# EAGLE board CapstoneControllerBoard (1) (EAGLE 9.2.2)
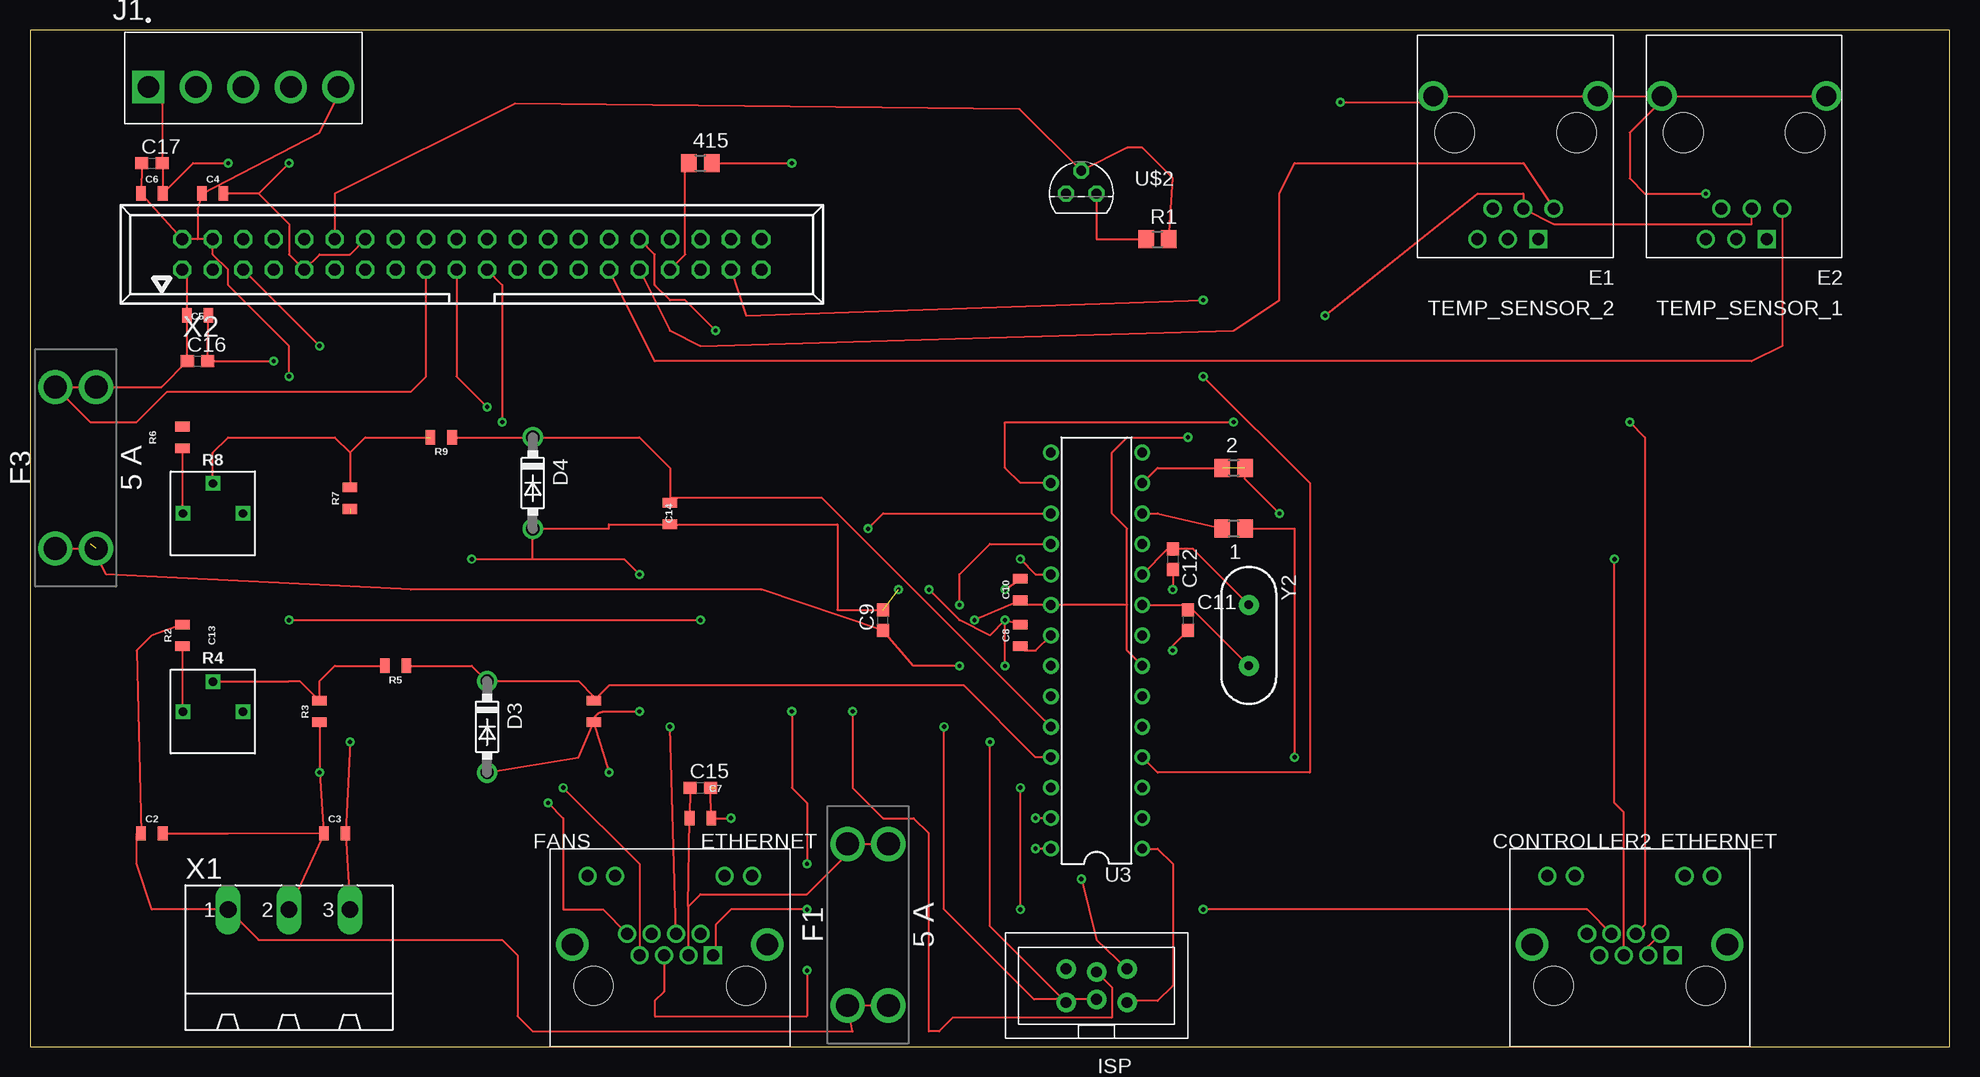
[diagram p0: board, top side]
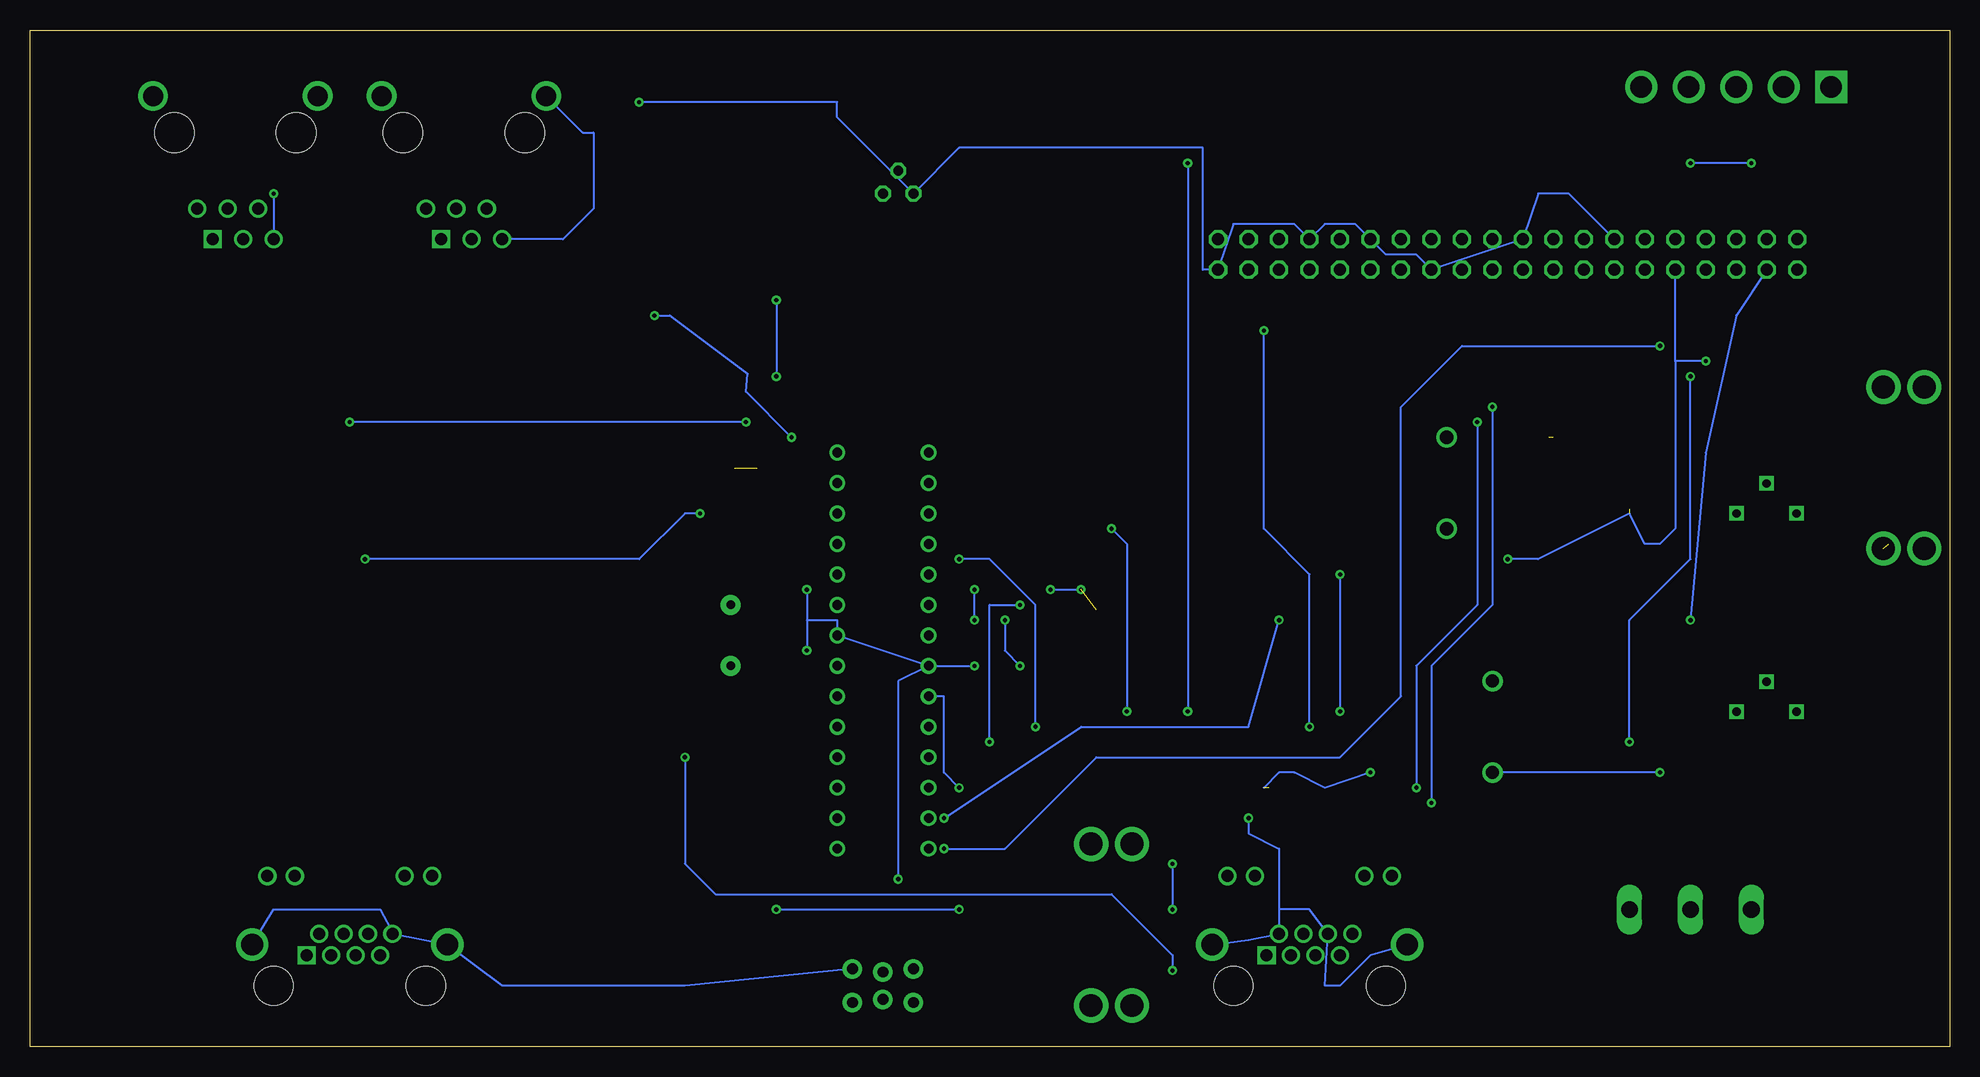
[diagram p1: board, bottom side, seen from below]

Size 160 x 84.76 mm. Coordinates in mm from the lower left corner, seen from the top.
Outline: 0,0 160,0 160,84.76 0,84.76 0,0
Copper layers (1*16): Top 0.035mm / dielectric 1.5mm / Bottom 0.035mm
Design rules "default": minimum track width 6mil, minimum drill 0.35mm, track to track 6mil, track to pad 6mil, pad to pad 6mil, via to via 6mil, smd to smd 6mil, copper to edge 40mil, drill to drill 6mil, minimum pad ring 10mil, minimum via ring 8mil, stop-mask expansion 4mil, vias tented up to drill 0mil, thermal gap 10mil

## Footprints (pad centres in the part's own frame; a part is rotated, then mirrored left to right if it is on the bottom)
R0805 = smd 1.3 x 1.5: 1 -0.95,0; 2 0.95,0
0805 = smd 0.8 x 1.2: 1 -0.9,0; 2 0.9,0
C0603 = smd 1.1 x 1: 1 -0.85,0; 2 0.85,0
A122645-ND = drill 1 square: P$1 3.58,2.54 | drill 1: P$2 2.56,4.32; P$3 1.54,2.54; P$4 0.52,4.32; P$5 -0.5,2.54; P$6 -1.52,4.32; P$7 -2.54,2.54; P$8 -3.56,4.32; P$9 -6.86,9.14; P$10 -4.57,9.14; P$11 4.57,9.14; P$12 6.86,9.14 | drill 1.8: P$13 -8.13,3.43; P$14 8.13,3.43 | hole 3.25: -6.35,0; 6.35,0
DO41-7.6 = drill 1.1 pad 1.7: A 3.81,0; C -3.81,0
1734723-1_RJ11 = drill 1 square: 1 -2.54,2.54 | drill 1: 2 0,2.54; 3 2.54,2.54; 4 -3.81,0; 5 -1.27,0; 6 1.27,0 | drill 1.65: SH1 -7.5,-9.4; SH2 6.22,-9.4 | hole 3.3: -5.72,-6.35; 4.44,-6.35
KEYSTONE_ATM_FUSEHOLDER = drill 1.905: L1 -6.731,1.702; L2 -6.731,-1.702; R1 6.731,1.702; R2 6.731,-1.702
AVRISP-BOX = drill 0.9 pad 1.626: 1 -1.397,2.54; 2 1.397,2.54; 3 -1.143,0; 4 1.143,0; 5 -1.397,-2.54; 6 1.397,-2.54
TE_3-641208-5 = drill 1.78 square: 1 -7.92,0 | drill 1.78: 2 -3.96,0; 3 0,0; 4 3.96,0; 5 7.92,0
TRIM_POT = drill 0.7 square: 1 -2.5,0; 2 0,2.5; 3 2.5,0
PDIP-T28 = drill 0.813 pad 1.2: 1 -16.51,-3.81; 2 -13.97,-3.81; 3 -11.43,-3.81; 4 -8.89,-3.81; 5 -6.35,-3.81; 6 -3.81,-3.81; 7 -1.27,-3.81; 8 1.27,-3.81; 9 3.81,-3.81; 10 6.35,-3.81; 11 8.89,-3.81; 12 11.43,-3.81; 13 13.97,-3.81; 14 16.51,-3.81; 15 16.51,3.81; 16 13.97,3.81; 17 11.43,3.81; 18 8.89,3.81; 19 6.35,3.81; 20 3.81,3.81; 21 1.27,3.81; 22 -1.27,3.81; 23 -3.81,3.81; 24 -6.35,3.81; 25 -8.89,3.81; 26 -11.43,3.81; 27 -13.97,3.81; 28 -16.51,3.81
TO92 = drill 0.813 octagon: 1 -1.27,0; 2 0,1.905; 3 1.27,0
MSTBA3 = drill 1.397 long: 1 -5.08,5.08; 2 0,5.08; 3 5.08,5.08
057-040-1 = drill 1 octagon: 1 -24.13,-1.27; 2 -24.13,1.27; 3 -21.59,-1.27; 4 -21.59,1.27; 5 -19.05,-1.27; 6 -19.05,1.27; 7 -16.51,-1.27; 8 -16.51,1.27; 9 -13.97,-1.27; 10 -13.97,1.27; 11 -11.43,-1.27; 12 -11.43,1.27; 13 -8.89,-1.27; 14 -8.89,1.27; 15 -6.35,-1.27; 16 -6.35,1.27; 17 -3.81,-1.27; 18 -3.81,1.27; 19 -1.27,-1.27; 20 -1.27,1.27; 21 1.27,-1.27; 22 1.27,1.27; 23 3.81,-1.27; 24 3.81,1.27; 25 6.35,-1.27; 26 6.35,1.27; 27 8.89,-1.27; 28 8.89,1.27; 29 11.43,-1.27; 30 11.43,1.27; 31 13.97,-1.27; 32 13.97,1.27; 33 16.51,-1.27; 34 16.51,1.27; 35 19.05,-1.27; 36 19.05,1.27; 37 21.59,-1.27; 38 21.59,1.27; 39 24.13,-1.27; 40 24.13,1.27
HC49US = drill 0.7 pad 1.651: 1 -2.54,0; 2 2.54,0

## Placement (x,y rotation side)
1  110  [R0805]  100.33,43.18 180 top
2  110  [R0805]  100.33,48.26 0 top
415  [R0805]  55.88,73.66 0 top
C2  0.1uF  [0805]  10.16,17.78 0 top
C3  0.1uF  [0805]  25.4,17.78 0 top
C4  0.1uF  [0805]  15.24,71.12 0 top
C5  0.1uF  [0805]  13.97,60.96 0 top
C6  0.1uF  [0805]  10.16,71.12 0 top
C7  0.1uF  [0805]  55.88,19.05 0 top
C8  0.1uF  [0805]  82.55,34.29 90 top
C9  10uF  [C0603]  71.12,35.56 90 top
C10  0.1uF  [0805]  82.55,38.1 90 top
C11  22pF  [C0603]  96.52,35.56 270 top
C12  22pF  [C0603]  95.25,40.64 270 top
C13  0.1uF  [0805]  46.99,27.94 270 top
C14  0.1uF  [0805]  53.34,44.45 270 top
C15  10uF  [C0603]  55.88,21.59 0 top
C16  10uF  [C0603]  13.97,57.15 0 top
C17  10uF  [C0603]  10.16,73.66 0 top
CONTROLLER2  ETHERNET  [A122645-ND]  133.35,5.08 0 top
D3  3.3V Zener  [DO41-7.6]  38.1,26.67 270 top
D4  3.3V Zener  [DO41-7.6]  41.91,46.99 270 top
E1  TEMP_SENSOR_2  [1734723-1_RJ11]  123.19,69.85 180 top
E2  TEMP_SENSOR_1  [1734723-1_RJ11]  142.24,69.85 180 top
F1  5 A  [KEYSTONE_ATM_FUSEHOLDER]  69.85,10.16 90 top
F3  5 A  [KEYSTONE_ATM_FUSEHOLDER]  3.81,48.26 90 top
FANS  ETHERNET  [A122645-ND]  53.34,5.08 0 top
FRAME2  FRAME-LETTERNO_PACKAGE  [DUMMY]  -21.59,115.57 0 top  (outside the outline)
ISP  AVRISP-BOX  [AVRISP-BOX]  88.9,5.08 90 top
J1  3-641208-5  [TE_3-641208-5]  17.78,80.01 0 top
R1  [R0805]  93.98,67.31 0 top
R2  2.4k  [0805]  12.7,34.29 90 top
R3  1.2k  [0805]  24.13,27.94 90 top
R4  0-5k  [TRIM_POT]  15.24,27.94 0 top
R5  5k  [0805]  30.48,31.75 180 top
R6  16k  [0805]  12.7,50.8 90 top
R7  1.3k  [0805]  26.67,45.72 90 top
R8  0-5k  [TRIM_POT]  15.24,44.45 0 top
R9  5k  [0805]  34.29,50.8 180 top
U3  ATmega328P PDIP  [PDIP-T28]  88.9,33.02 90 top
U$2  DS18B  [TO92]  87.63,71.12 0 top
X1  MSTBA3  [MSTBA3]  21.59,6.35 0 top
X2  057-040-1  [057-040-1]  36.83,66.04 0 top
Y2  [HC49US]  101.6,34.29 270 top

## Library data of the parts
1 2 415 R1 = rcl; SPICEPREFIX: R
C2-C8 C10 C13 C14 = SparkFun-Capacitors; PROD_ID: CAP-11625
C9 C11 C12 C15-C17 ISP = adafruit
CONTROLLER2 FANS = ETHERNET-3
D3 D4 F1 F3 R4 R8 U3 = CustomLibrary
E1 E2 = 5555140-6 RJ11
FRAME2 = SparkFun-Aesthetics; DESIGNER: Ben Vandenberg; REV: 0.0; VERSION: v01
J1 = 3-641208-5; AVAILABILITY: Unavailable; COMMENT: 3-641208-5; DESCRIPTION: MTA-156 Series, 3.96mm Pitch 5 Way 1 RowStraight PCB Header, Solder Term, 7A; EU_ROHS_COMPLIANCE: Compliant; MF: TE Connectivity; MP: 3-641208-5; PACKAGE: None; PRICE: None; TE_PURCHASE_URL: https://www.te.com/usa-en/product-3-641208-5.html?te_bu=Cor&te_type=disp&te_campaign=seda_glo_cor-seda-global-disp-prtnr-fy19-seda-model-bom-cta_sma-317_1&elqCampaignId=32493
R2 R3 R5-R7 R9 = SparkFun-Resistors; PROD_ID: RES-11622
U$2 = temperatureboardElizabeth
X1 = con-phoenix-508; MF: FARNELL; MPN: 1757255; OC_FARNELL: 3705183; OC_NEWARK: 71C4162
X2 = con-panduit; OC_FARNELL: unknown; OC_NEWARK: unknown
Y2 = SparkFun-FreqCtrl

## Nets
3.3V: C9.1 C10.1 E1.5 E2.5 F3.L1 F3.L2 U3.7 U3.20
3.3V1: CONTROLLER2.P$1
3.3V_RETURN: CONTROLLER2.P$2 CONTROLLER2.P$3
12V: C2.1 F1.L1 F1.L2 R2.2 X1.1
46V: R6.2
46V1: CONTROLLER2.P$7
+5V: C3.2 C4.1 C6.1 C17.1 J1.5 X1.3 X2.2 X2.4
AIR_STARVE_RELAY: 2.1 2.2 CONTROLLER2.P$5 U3.13
DQ_1: E2.4 X2.29
DQ_2: E1.4 X2.31
DQ_3: R1.2 U$2.2 X2.12
EXTRA_PIN_1: FANS.P$8 X2.19
EXTRA_PIN_2: FANS.P$7 X2.21
EXTRA_PIN_3: X2.23
FAN_PWM: 415.2 FANS.P$1
FAN_PWM_ATMEL: 1.1 FANS.P$5
FUEL_CELL_CURRENT1: CONTROLLER2.P$6 U3.23
GATE_SIG: CONTROLLER2.P$4 U3.16
GND: C2.2 C3.1 C4.2 C5.2 C6.2 C7.2 C8.2 C9.2 C10.2 C11.2 C12.2 C13.2 C14.2 C15.2 C16.2 C17.2 CONTROLLER2.P$8 CONTROLLER2.P$13 CONTROLLER2.P$14 D3.A D4.A E1.3 E1.SH1 E1.SH2 E2.3 E2.SH1 E2.SH2 FANS.P$2 FANS.P$6 FANS.P$13 FANS.P$14 ISP.6 J1.1 R3.1 R7.1 U3.8 U3.22 U$2.1 X1.2 X2.9 X2.14 X2.20 X2.25 X2.30 X2.34 X2.39
LOAD_ENABLE: U3.4 X2.37
N$1: C8.1 U3.21
N$2: ISP.1 U3.18
N$3: ISP.3 U3.19
N$4: R8.3
N$5: R4.3
N$6: 415.1 X2.33
N$7: R2.1 R4.1
N$8: 1.2 U3.12
N$9: C5.1 C16.1 F3.R1 F3.R2 X2.1 X2.17
N$10: R6.1 R8.1
N$11: R3.2 R4.2 R5.2
N$12: ISP.4 U3.17
N$13: C11.1 U3.9 Y2.2
N$14: C12.1 U3.10 Y2.1
N$15: R7.2 R8.2 R9.2
N$16: C7.1 C15.1 F1.R1 F1.R2 FANS.P$3
RESET: ISP.5 U3.1
SCALED_BATT_V: C13.1 D3.C R5.1 U3.25
SCALED_FUEL_CELL_V: C14.1 D4.C R9.1 U3.24
SCL: U3.28 X2.5
SDA: U3.27 X2.3
VCC: ISP.2
VDD: R1.1 U$2.3
WARNING_LED: FANS.P$4 X2.32

## Tracks (layer width: path | path; a pad name or v marks a point on that pad's centre or on a via)
3.3V  (via drill 0.35)  (1 unrouted)
  Top 0.152: v107.95,60.96 120.65,71.12 124.46,71.12 E1.5 127,68.58 143.51,68.58 E2.5 | U3.7 91.44,33.02 91.44,36.83 | 91.44,36.83 U3.20 82.92,36.83 C10.1 v78.74,35.56 | 91.44,36.83 91.44,43.18 90.17,44.45 90.17,49.53 91.44,50.8 v96.52,50.8 | v77.47,31.75 73.66,31.75 C9.1 60.96,38.1 31.75,38.1 6.35,39.37 5.08,41.91 | F3.L1 F3.L2
  Bottom 0.152: v107.95,60.96 106.68,60.96 100.18,56.08 100.33,54.61 v96.52,50.8 | v78.74,35.56 78.74,33.02 v77.47,31.75
3.3V_RETURN
  Top 0.152: CONTROLLER2.P$2 134.89,8.38 CONTROLLER2.P$3
12V
  Top 0.152: R2.2 10.16,34.29 8.89,33.02 C2.1 8.89,17.78 8.89,15.24 10.16,11.43 X1.1 19.05,8.89 39.37,8.89 40.64,7.62 40.64,2.54 41.91,1.27 68.58,1.27 F1.L1 F1.L2
+5V  (via drill 0.35)
  Top 0.152: 13.97,67.31 X2.4 15.24,66.04 16.51,64.77 16.51,63.5 21.59,58.42 v21.59,55.88 | 13.97,67.31 X2.2 C6.1 C17.1 | J1.5 25.4,78.74 24.13,76.2 C4.1 13.97,69.85 13.97,67.31 | v26.67,25.4 C3.2 X1.3
  Bottom 0.152: v26.67,25.4 26.67,35.56 21.59,40.64 v21.59,55.88
AIR_STARVE_RELAY  (via drill 0.35)  (1 unrouted)
  Top 0.152: CONTROLLER2.P$5 132.85,19.55 132.08,20.32 v132.08,40.64 | U3.13 93.98,48.26 2.1 | v104.14,44.45 101.28,47.31 2.2
  Bottom 0.152: v132.08,40.64 109.22,40.64 105.41,44.45 v104.14,44.45
DQ_1
  Top 0.152: E2.4 146.05,58.42 143.51,57.15 52.07,57.15 X2.29
DQ_2
  Top 0.152: X2.31 53.34,59.69 55.88,58.42 79.99,59.11 | 79.99,59.11 100.33,59.69 104.14,62.23 104.14,71.12 105.41,73.66 124.46,73.66 E1.4 | 79.99,59.11
DQ_3
  Top 0.152: R1.2 95.25,72.39 92.71,74.93 91.44,74.93 U$2.2 82.49,78.16 40.42,78.63 25.4,71.12 X2.12
EXTRA_PIN_1  (via drill 0.35)
  Top 0.152: X2.19 35.56,55.88 v38.1,53.34 | v43.18,20.32 44.45,19.05 44.45,11.43 47.75,11.43 FANS.P$8
  Bottom 0.152: v38.1,53.34 38.1,36.83 43.18,31.75 v43.18,20.32
EXTRA_PIN_2  (via drill 0.35)
  Top 0.152: X2.21 39.37,63.5 v39.37,52.07 | FANS.P$7 50.8,15.24 v44.45,21.59
  Bottom 0.152: v39.37,52.07 39.37,36.83 44.45,31.75 v44.45,21.59
FAN_PWM  (via drill 0.35)
  Top 0.152: FANS.P$1 57.15,7.62 57.15,10.16 58.42,11.43 v64.77,11.43 | 415.2 v63.5,73.66 | v63.5,27.94 63.5,21.59 64.77,20.32 v64.77,15.24
  Bottom 0.152: v63.5,73.66 v63.5,27.94 | v64.77,15.24 v64.77,11.43
FAN_PWM_ATMEL  (via drill 0.35)
  Top 0.152: 1.1 105.41,43.18 v105.41,24.13 | v64.77,6.35 64.77,2.54 52.07,2.54 52.07,3.81 52.84,4.58 FANS.P$5
  Bottom 0.152: v105.41,24.13 105.41,15.24 102.87,12.7 69.85,12.7 64.77,7.62 v64.77,6.35
FUEL_CELL_CURRENT1  (via drill 0.35)
  Top 0.152: CONTROLLER2.P$6 129.8,11.43 v97.79,11.43 | v82.55,11.43 v82.55,21.59
  Bottom 0.152: v97.79,11.43 v82.55,11.43 | v82.55,21.59 83.82,22.86 83.82,29.21 U3.23
GATE_SIG  (via drill 0.35)
  Top 0.152: U3.16 82.55,46.99 81.28,48.26 81.28,52.07 v100.33,52.07 | v133.35,52.07 134.62,50.8 134.62,10.16 CONTROLLER2.P$4
  Bottom 0.152: v100.33,52.07 v133.35,52.07
GND  (via drill 0.35)  (3 unrouted)
  Top 0.152: C5.2 C16.2 v20.32,57.15 | v36.83,40.64 41.91,40.64 | 41.91,40.64 D4.A 48.26,43.18 48.26,43.55 C14.2 67.31,43.55 67.31,36.41 C9.2 | R3.1 v24.13,22.86 24.5,17.81 | 24.5,17.81 C3.1 X1.2 | C2.2 16.51,17.78 24.5,17.81 | D3.A 45.72,24.13 C13.2 | C13.2 v48.26,22.86 | C15.2 C7.2 v58.42,19.05 | v81.28,31.75 v81.28,35.56 | v81.28,35.56 C8.2 | v81.28,38.1 C10.2 | v81.28,35.56 80.01,34.29 77.47,35.56 v74.93,38.1 | v87.63,13.97 88.9,8.89 ISP.6 | C12.2 v95.25,38.1 | v95.25,33.02 95.25,33.44 C11.2 | 41.91,40.64 49.53,40.64 v50.8,39.37 | C13.2 arc-90 47.89,27.94 v50.8,27.94 | v109.22,78.74 116.84,78.74 116.97,78.87 E1.SH2 E1.SH1 E2.SH2 | E2.SH2 E2.SH1 | E2.SH2 136.02,78.87 133.35,76.2 133.35,72.39 134.62,71.12 v139.7,71.12 | J1.1 11.01,78.86 C17.2 11.06,73.61 C6.2 13.6,73.66 v16.51,73.66 | 19.05,71.12 C4.2 | v21.59,73.66 19.05,71.12 | 19.05,71.12 21.59,68.58 21.59,66.04 X2.9 24.13,66.04 26.67,66.04 X2.14
  Bottom 0.152: X2.14 31.75,71.12 34.29,71.12 X2.20 X2.25 44.45,66.04 46.99,66.04 X2.30 49.53,68.58 52.07,68.58 X2.34 54.61,68.58 59.69,68.58 X2.39 62.23,64.77 62.23,74.93 82.55,74.93 U$2.1 92.71,77.47 92.71,78.74 v109.22,78.74 | v20.32,57.15 22.86,57.15 | 22.86,57.15 X2.9 | 22.86,57.15 22.86,43.18 24.13,41.91 25.4,41.91 26.67,44.45 34.29,40.64 v36.83,40.64 | v24.13,22.86 D3.A | v48.26,22.86 52.07,21.59 54.61,22.86 55.88,22.86 57.15,21.59 | v58.42,19.05 58.42,17.78 55.88,16.51 55.89,11.43 | 55.89,11.43 FANS.P$2 58.42,8.89 FANS.P$14 | FANS.P$13 48.26,7.62 50.8,5.08 52.07,5.08 FANS.P$6 53.34,11.43 55.89,11.43 | ISP.6 105.41,5.08 120.65,5.08 CONTROLLER2.P$13 129.69,9.38 | 129.69,9.38 CONTROLLER2.P$8 | CONTROLLER2.P$14 139.7,11.43 130.81,11.43 129.69,9.38 | U3.22 U3.8 92.71,35.56 95.25,35.56 | U3.22 v81.28,31.75 | v81.28,35.56 v81.28,38.1 | v74.93,38.1 v72.39,38.1 | U3.22 87.63,30.48 v87.63,13.97 | v95.25,38.1 95.25,35.56 | 95.25,35.56 v95.25,33.02 | v50.8,39.37 v50.8,27.94 | v139.7,71.12 E2.3 | E1.SH2 113.92,76.2 113.03,76.2 113.03,69.85 115.57,67.31 E1.3 | v16.51,73.66 v21.59,73.66
LOAD_ENABLE  (via drill 0.35)
  Top 0.152: X2.37 59.69,60.96 v97.79,62.23 | U3.4 93.98,22.86 106.68,22.86 106.68,46.99 v97.79,55.88
  Bottom 0.152: v97.79,62.23 v97.79,55.88
N$1
  Top 0.152: C8.1 82.92,33.02 83.82,33.02 U3.21
N$2  (via drill 0.35)
  Top 0.152: ISP.1 80.01,10.03 v80.01,25.4 | v77.47,36.83 77.47,39.37 80.01,41.91 U3.18
  Bottom 0.152: v80.01,25.4 80.01,36.83 v77.47,36.83
N$3  (via drill 0.35)
  Top 0.152: ISP.3 83.69,3.94 76.2,11.43 v76.2,26.67 | U3.19 83.82,39.37 v82.55,40.64
  Bottom 0.152: v76.2,26.67 76.2,36.83 80.01,40.64 v82.55,40.64
N$6
  Top 0.152: X2.33 54.61,66.04 54.61,73.66 415.1
N$7
  Top 0.152: R2.1 12.7,27.98 R4.1
N$8
  Top 0.152: U3.12 93.98,44.45 1.2
N$9
  Top 0.152: X2.1 13.07,64.4 C5.1 13.07,57.2 C16.1 10.96,54.99 F3.R2 F3.R1 5.03,52.07 8.89,52.07 11.43,54.61 31.75,54.61 33.02,55.88 X2.17
N$10
  Top 0.152: R6.1 12.7,44.49 R8.1
N$11
  Top 0.152: R4.2 21.55,30.44 21.59,30.48 22.49,30.48 R3.2 24.13,30.48 25.4,31.75 R5.2
N$12  (via drill 0.35)
  Top 0.152: ISP.4 90.17,4.95 90.17,2.41 76.92,2.41 75.77,1.27 74.93,1.27 74.93,17.78 73.66,19.05 71.12,19.05 68.58,21.59 v68.58,27.94 | U3.17 71.12,44.45 v69.85,43.18
  Bottom 0.152: v69.85,43.18 68.58,41.91 v68.58,27.94
N$13
  Top 0.152: U3.9 96.1,36.83 C11.1 96.94,36.41 Y2.2
N$14
  Top 0.152: Y2.1 96.94,41.49 C12.1 94.83,41.49 U3.10
N$15  (1 unrouted)
  Top 0.152: R8.2 15.24,49.53 16.51,50.8 25.4,50.8 26.67,49.53 | 26.67,49.53 R7.2 | 26.67,49.53 27.94,50.8 33.02,50.8
N$16
  Top 0.152: FANS.P$3 54.88,11.7 | 54.88,11.7 54.86,11.68 C7.1 C15.1 | 54.88,11.7 55.88,12.7 64.77,12.7 68.15,16.08 F1.R1 F1.R2 | C15.1
RESET
  Top 0.152: U3.1 93.98,16.51 95.25,15.24 95.25,5.08 93.98,3.81 91.44,3.81 ISP.5
SCALED_BATT_V
  Top 0.152: 31.75,31.75 R5.1 36.83,31.75 D3.C 45.72,30.48 46.99,29.21 C13.1 48.26,30.11 77.84,30.11 83.82,24.13 U3.25
SCALED_FUEL_CELL_V
  Top 0.152: R9.1 D4.C 50.8,50.8 53.34,48.26 53.34,45.72 | 53.34,45.72 C14.1 | 53.34,45.72 66.04,45.72 U3.24
SCL  (via drill 0.35)
  Top 0.152: U3.28 v83.82,16.51 | v24.13,58.42 X2.5
  Bottom 0.152: v83.82,16.51 78.74,16.51 71.12,24.13 50.8,24.13 45.72,29.21 45.72,53.34 40.64,58.42 v24.13,58.42
SDA  (via drill 0.35)
  Top 0.152: U3.27 v83.82,19.05 | v21.59,35.56 v55.88,35.56
  Bottom 0.152: v83.82,19.05 72.39,26.67 58.42,26.67 v55.88,35.56 | X2.3 17.78,60.96 20.32,49.53 v21.59,35.56
VDD
  Top 0.152: R1.1 88.9,67.31 U$2.3
WARNING_LED  (via drill 0.35)
  Top 0.152: FANS.P$4 v53.34,26.67 | v57.15,59.69 54.61,62.23 53.34,62.23 52.07,63.5 52.07,66.04 X2.32
  Bottom 0.152: v53.34,26.67 53.34,39.37 57.15,43.18 v57.15,59.69